# Altium PCB Support ESP32-CAM.PcbDoc
Units mil, origin at the board's own origin, x right, y up, seen from the top; angles counter-clockwise.
Board outline 1210 x 2725 mil, 2 copper layers (Top Layer, Bottom Layer); 6 components, 8 nets, 45 pads, 5 vias.
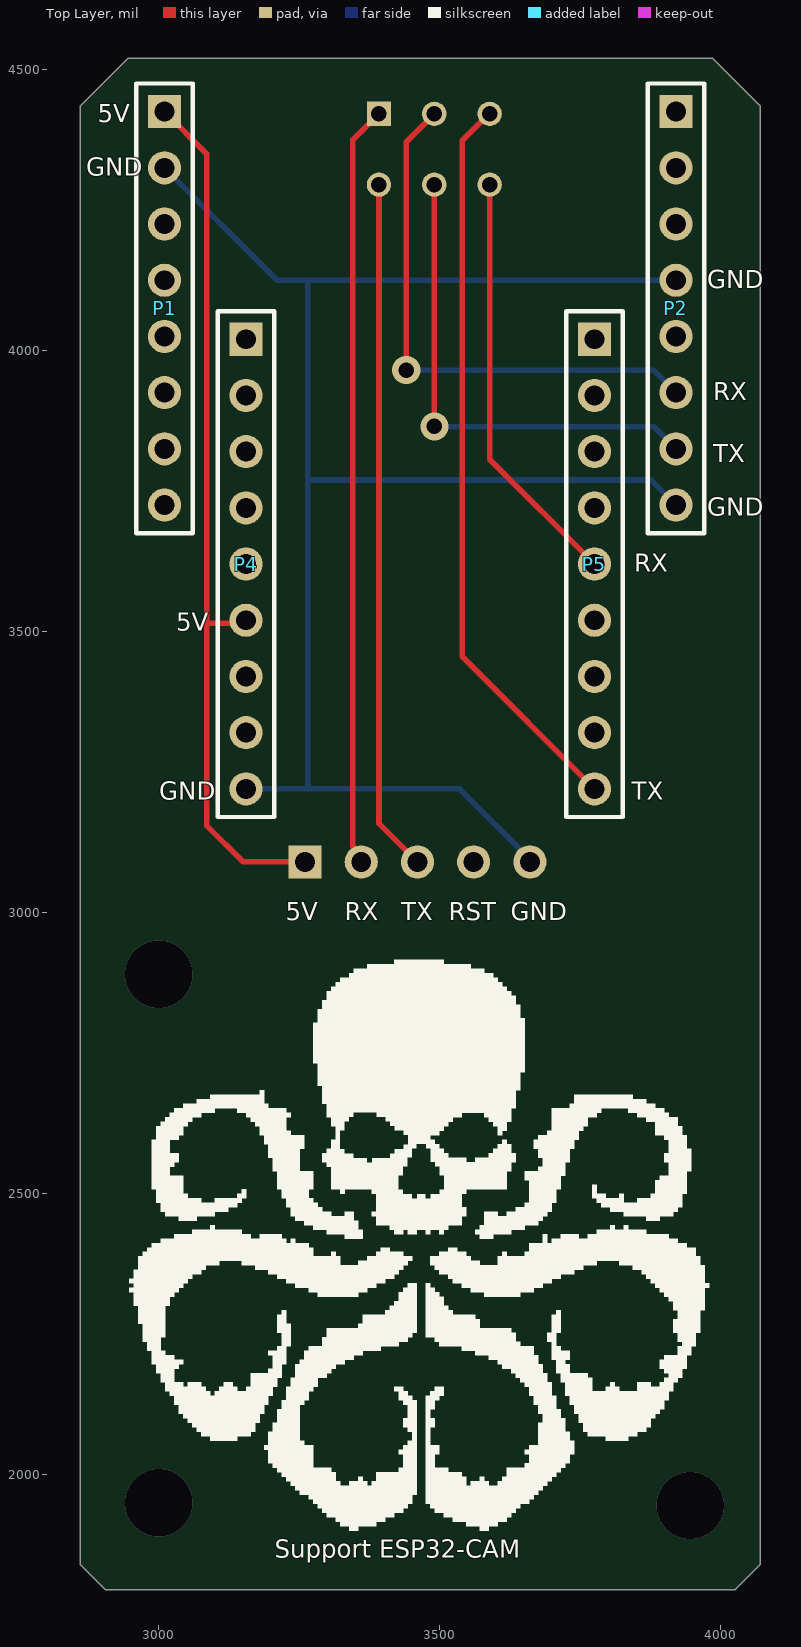
[diagram p0: Top Layer view]
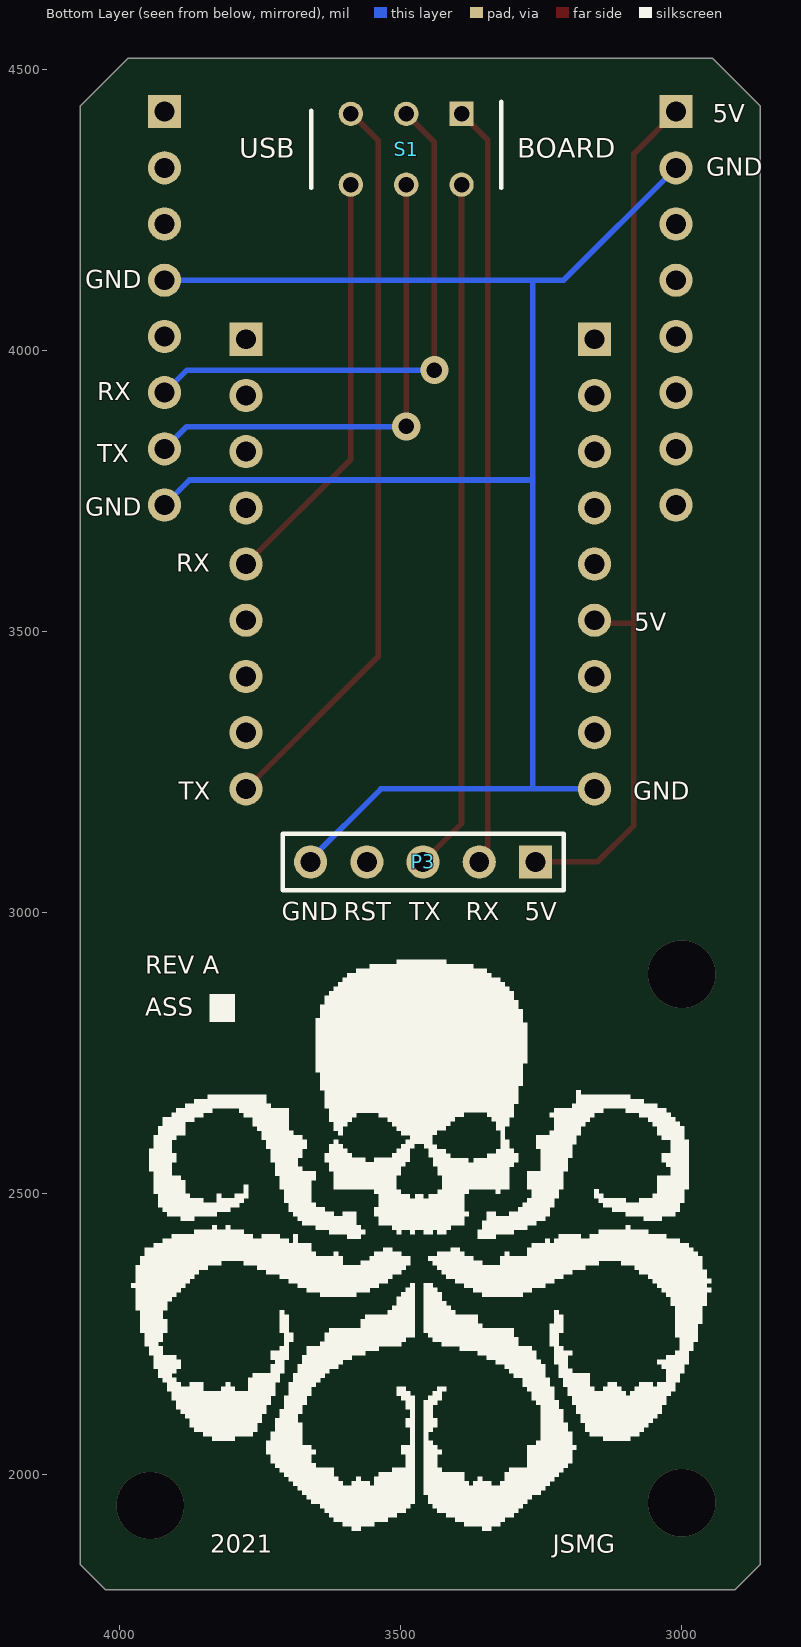
[diagram p1: Bottom Layer view, seen from below]

## Layer stack, top to bottom
Top Solder: solder mask 0.4, Solder Resist, Dk 3.5
Top Layer: signal copper 1.4
Dielectric 1: dielectric 12.6, FR-4, Dk 4.8
Bottom Layer: signal copper 1.4
Bottom Solder: solder mask 0.4, Solder Resist, Dk 3.5

## Board outline
2860,1840 2905,1795 4025,1795 4070,1840 4070,4435 3985,4520 2945,4520 2860,4435

## Design rules (kind name [scope] priority, off if disabled: settings)
Clearance [All] p1: gap=10 ignorepadtopadclearanceinfootprint=FALSE except(0: Arc-Hole Track-Hole SMDPad-Hole THPad-Hole Via-Hole Fill-Hole Poly-Hole Region-Hole Text-Hole)
PolygonConnect [All] p1: connectstyle=Relief reliefconductorwidth=10 reliefentries=4 polygonreliefangle="90 Angle" airgapwidth=10
RoomDefinition "Support ESP32-CAM" [InComponentClass('Support ESP32-CAM')] p1: confinementstyle=ConfineOut formatcopy=TRUE lockcomponents=FALSE outline 7045,1060 8090,1060 8090,2080 7045,2080
RoutingVias [All] p1: holewidth=28 width=50 viastyle="Through Hole" minholewidth=28 minwidth=50 maxholewidth=28 maxwidth=50
SolderMaskExpansion [All] p1: expansion=4 istentingtop=FALSE
Width [All] p1: maxlimit=10 minlimit=10 preferedwidth=10
30 further rules are at their usual default settings.

## Classes and differential pairs
component class "Support ESP32-CAM": P1 P2 P3 P4 P5

## Components (designator, comment, footprint, x,y, rotation, side; value= is the part's Value field where it differs from the comment)
P1 "Header 8" HDR1X8 3010,4425 r270 top
P2 "Header 8" HDR1X8 3920,4425 r270 top
P3 "Header 5" HDR1X5 3260,3090 r0 bottom
P4 "Header 9" HDR1X9 3155,4020 r270 top
P5 "Header 9" HDR1X9 3775,4020 r270 top
S1 "MHS222" DIP320W50P250L860H550Q6N 3490,4357.99 r270 bottom

## Footprints (in the part's own frame and the unit in brackets; to place one, negate y for a bottom-side part, rotate by r counter-clockwise, add the part's x,y. Pads: shape width x height; smd on the part's side, far side on the other; paste and mask are expansions set on the pad)
DIP320W50P250L860H550Q6N [mm]
  rect 1.1x1.1 hole 0.7: 1(-1.6,2.5)
  round 1.1 hole 0.7: 2(-1.6,0) 3(-1.6,-2.5) 4(1.6,-2.5) 5(1.6,0) 6(1.6,2.5)
  silkscreen extent -2.15,-4.3 1.75,4.3, body extent -1.85,-4.3 1.85,4.3, height 5.5
HDR1X5 [mm] "Connector; Header; 5 Position"
  rect 1.5x1.5 hole 0.9: 1(0,0)
  round 1.5 hole 0.9: 2(2.54,0) 3(5.08,0) 4(7.62,0) 5(10.16,0)
  silkscreen extent -1.27,-1.27 11.43,1.27
HDR1X8 [mm] "Connector; Header; 8 Position"
  rect 1.5x1.5 hole 0.9: 1(0,0)
  round 1.5 hole 0.9: 2(2.54,0) 3(5.08,0) 4(7.62,0) 5(10.16,0) 6(12.7,0) 7(15.24,0) 8(17.78,0)
  silkscreen extent -1.27,-1.27 19.05,1.27
HDR1X9 [mm] "Connector; Header; 9 Position"
  rect 1.5x1.5 hole 0.9: 1(0,0)
  round 1.5 hole 0.9: 2(2.54,0) 3(5.08,0) 4(7.62,0) 5(10.16,0) 6(12.7,0) 7(15.24,0) 8(17.78,0) 9(20.32,0)
  silkscreen extent -1.27,-1.27 21.59,1.27

## Part data
P1 P2: "Header, 8-Pin", LatestRevisionDate=17-Jul-2002, LatestRevisionNote="Re-released for DXP Platform.", Publisher="Altium Limited"
  P1: Name="ESP left"
  P2: Name="ESP right"
P3: "Header, 5-Pin", LatestRevisionDate=17-Jul-2002, LatestRevisionNote="Re-released for DXP Platform.", Name="Main board", Publisher="Altium Limited"
P4 P5: "Header, 9-Pin", LatestRevisionDate=17-Jul-2002, LatestRevisionNote="Re-released for DXP Platform.", Publisher="Altium Limited"
  P4: Name="FT232 left"
  P5: Name="FT232 right"
S1: "Switch", Manufacturer_Name=Fujisoku, Datasheet Link=http://docs-asia.electrocomponents.com/webdocs/0fe8/0900766b80fe862b.pdf, Height=3.5mm, Manufacturer_Part_Number=MHS222, Name="Input select"

## Via types
v1: diameter 120, hole 120, Top Layer to Bottom Layer, 3 vias
v2: diameter 50, hole 28, Top Layer to Bottom Layer, 2 vias

## Nets (pads, with @x,y where several pads share a name; then routed paths per layer and width w, separated by ;. In a path a pad name is that pad's centre, name@x,y a point inside that pad or via, vN(x,y) a via of type N, cw(c..) or ccw(c..) an arc to the next point about the centre after c; other vN are vias at no path point)
5V: P1.1 P3.1 P4.6 | length 1575.1
  Top Layer w10: P1.1 3085,4350 3085,3515 ; P4.6 3150,3515 3085,3515 ; P3.1 3150,3090 3085,3155 3085,3515
GND: P1.2 P2.4 P2.8 P3.5 P4.9 | length 3131.6
  Bottom Layer w10: P1.2 3210,4125 3265,4125 ; P4.9 3265,3220 ; P3.5@3662.5,3092.5 3535,3220 3265,3220 ; P2.8 3875.47,3769.53 3265,3769.53 ; P2.4 3265,4125 ; 3265,3220 3265,3769.53 ; 3265,3769.53 3265,4125
RX_Board: P3.2 S1.1 | length 1356.5
  Top Layer w10: P3.2 3360,3103.27 3345,3118.27 3345,4374.41 3374.92,4404.33 S1.1
RX_CAM: P2.6 S1.2 | length 973.3
  Top Layer w10: v2(3440,3965) 3440,4370.98 S1.2
  Bottom Layer w10: v2(3440,3965) 3880,3965 P2.6
RX_FT232: P5.5 S1.4 | length 752.3
  Top Layer w10: S1.4 3588.43,3806.57 P5.5
TX_Board: P3.3 S1.6 | length 1233.3
  Top Layer w10: S1.6 3391.57,3158.43 P3.3
TX_CAM: P2.7 S1.5 | length 880.7
  Top Layer w10: v2(3490,3865) 3490,4285 3485,4290 S1.5
  Bottom Layer w10: v2(3490,3865) 3490.47,3864.53 3880.47,3864.53 P2.7
TX_FT232: P5.9 S1.3 | length 1319.3
  Top Layer w10: S1.3 3586.84,4420.98 3540,4374.14 3540,3455 P5.9
pads on no net: P1.3 P1.4 P1.5 P1.6 P1.7 P1.8 P2.1 P2.2 P2.3 P2.5 P3.4 P4.1 P4.2 P4.3 P4.4 P4.5 P4.7 P4.8 P5.1 P5.2 P5.3 P5.4 P5.6 P5.7 P5.8
copper on no net:
  other v1: 3945,1945 3000,1950 3000,2890

## Silkscreen, mask and mechanical layers (free items; w line width, h text height)
Top Overlay:
  drawing of 7 lines, arcs and shapes, not listed
  text "5V" at 2891,4406 h32
  text "GND" at 2871,4311 h32
  text "GND" at 3976,4111 h32
  text "RX" at 3986,3911 h32
  text "TX" at 3986,3801 h32
  text "GND" at 3976,3706 h32
  text "RX" at 3846,3606 h32
  text "5V" at 3031,3501 h32
  text "GND" at 3001,3201 h32
  text "TX" at 3841,3201 h32
  text "5V" at 3226,2986 h32
  text "RX" at 3331,2986 h32
  text "TX" at 3431,2986 h32
  text "RST" at 3516,2986 h32
  text "GND" at 3626,2986 h32
  text "Support ESP32-CAM" at 3206,1851.66 h32
Bottom Overlay:
  drawing of 8 lines, arcs and shapes, not listed
  text "5V" at 2944.32,4406 h32
  text "BOARD" at 3292,4343 h35
  text "USB" at 3787,4343 h35
  text "GND" at 2956.31,4311 h32
  text "GND" at 4061.31,4111 h32
  text "RX" at 4039.32,3911 h32
  text "TX" at 4039.32,3801 h32
  text "GND" at 4061.31,3706 h32
  text "RX" at 3899.32,3606 h32
  text "5V" at 3084.32,3501 h32
  text "GND" at 3086.31,3201 h32
  text "TX" at 3894.32,3201 h32
  text "5V" at 3279.32,2986 h32
  text "RX" at 3384.32,2986 h32
  text "TX" at 3484.32,2986 h32
  text "RST" at 3601.31,2986 h32
  text "GND" at 3711.31,2986 h32
  text "REV A" at 3954,2891 h32
  text "ASS" at 3954,2816 h32
  text "JSMG" at 3229,1861 h32
  text "2021" at 3839,1861 h32
Mechanical 1:
  the board outline again, w20